# Altium PCB PCB_StyloDuino_2023-02-26.pcbdoc
Units mil, origin at the board's own origin, x right, y up, seen from the top; angles counter-clockwise.
Board outline 8220.46 x 5753.62 mil, 2 copper layers (Top Layer, Bottom Layer); 21 components, 48 nets, 93 pads, 0 vias.
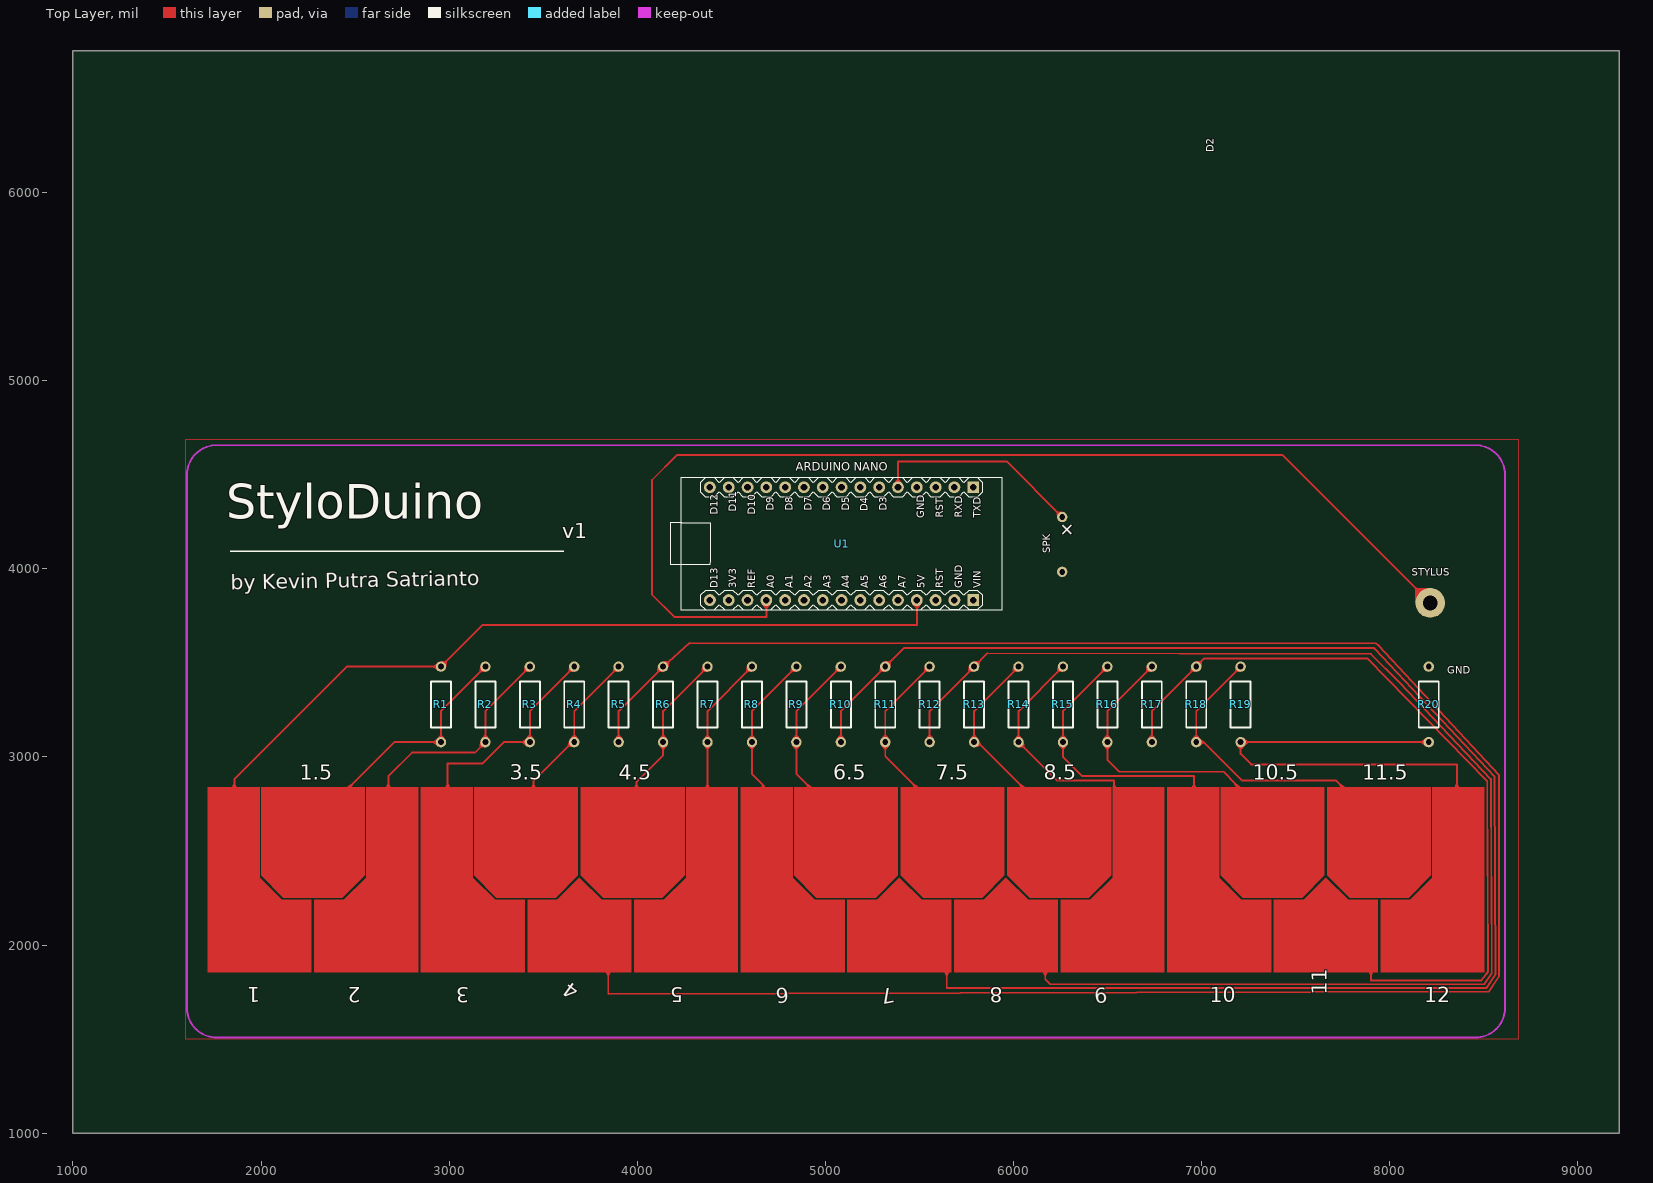
[diagram p0: Top Layer view]
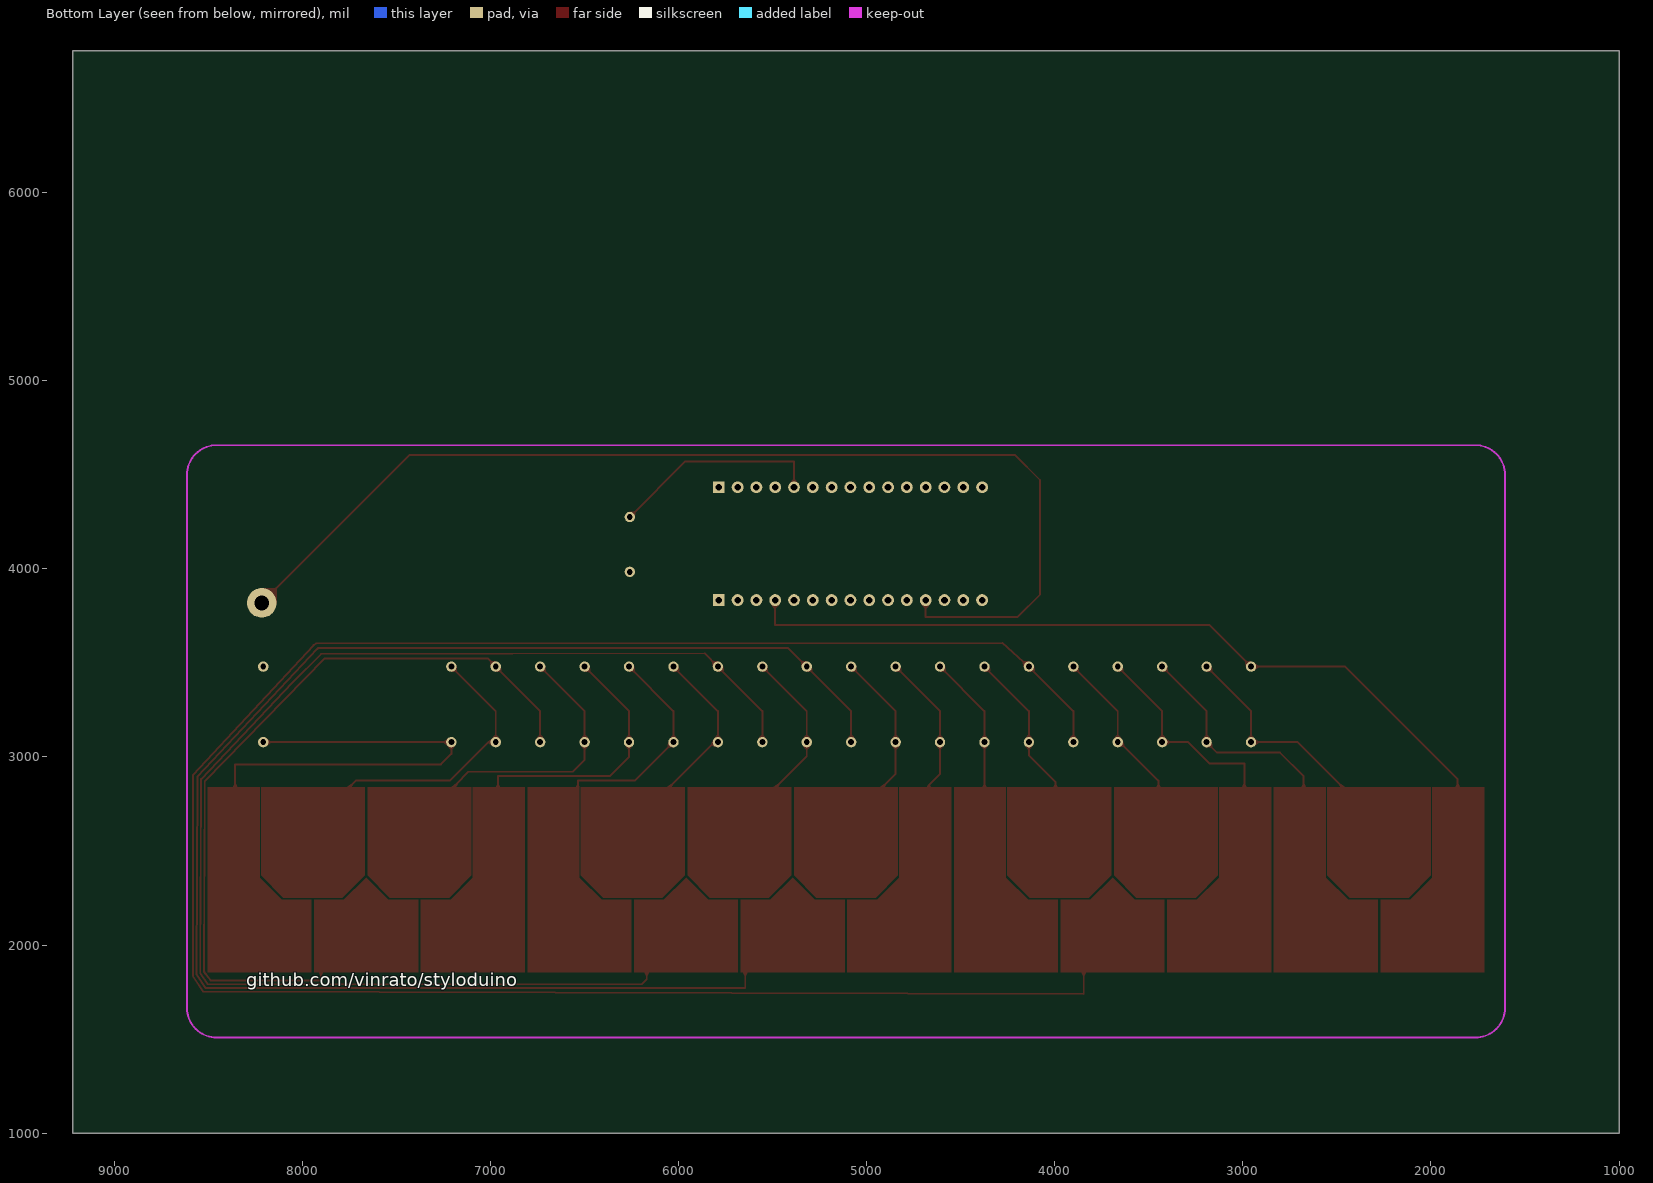
[diagram p1: Bottom Layer view, seen from below]

## Layer stack, top to bottom
Top Layer: signal copper (thickness not stored)
Dielectric: dielectric 12.6, FR-4, Dk 4.8
Bottom Layer: signal copper (thickness not stored)

## Board outline
9220.46,1000 1000,1000 1000,6753.62 9220.46,6753.62

## Components (designator, comment, footprint, x,y, rotation, side; value= is the part's Value field where it differs from the comment)
R1 "10k" RES-TH_BD2.7-L6.2-P10.20-D0.4 2956.69,3279.52 r90 top
R2 "10k" RES-TH_BD2.7-L6.2-P10.20-D0.4 3192.91,3279.52 r90 top
R3 "10k" RES-TH_BD2.7-L6.2-P10.20-D0.4 3429.13,3279.52 r90 top
R4 "10k" RES-TH_BD2.7-L6.2-P10.20-D0.4 3665.35,3279.52 r90 top
R5 "10k" RES-TH_BD2.7-L6.2-P10.20-D0.4 3901.57,3279.52 r90 top
R6 "10k" RES-TH_BD2.7-L6.2-P10.20-D0.4 4137.79,3279.52 r90 top
R7 "10k" RES-TH_BD2.7-L6.2-P10.20-D0.4 4374.01,3279.52 r90 top
R8 "10k" RES-TH_BD2.7-L6.2-P10.20-D0.4 4610.23,3279.52 r90 top
R9 "10k" RES-TH_BD2.7-L6.2-P10.20-D0.4 4846.45,3279.52 r90 top
R10 "10k" RES-TH_BD2.7-L6.2-P10.20-D0.4 5082.67,3279.52 r90 top
R11 "10k" RES-TH_BD2.7-L6.2-P10.20-D0.4 5318.89,3279.52 r90 top
R12 "10k" RES-TH_BD2.7-L6.2-P10.20-D0.4 5555.11,3279.52 r90 top
R13 "10k" RES-TH_BD2.7-L6.2-P10.20-D0.4 5791.33,3279.52 r90 top
R14 "10k" RES-TH_BD2.7-L6.2-P10.20-D0.4 6027.55,3279.52 r90 top
R15 "10k" RES-TH_BD2.7-L6.2-P10.20-D0.4 6263.77,3279.52 r90 top
R16 "10k" RES-TH_BD2.7-L6.2-P10.20-D0.4 6499.99,3279.52 r90 top
R17 "10k" RES-TH_BD2.7-L6.2-P10.20-D0.4 6736.21,3279.52 r90 top
R18 "10k" RES-TH_BD2.7-L6.2-P10.20-D0.4 6972.43,3279.52 r90 top
R19 "10k" RES-TH_BD2.7-L6.2-P10.20-D0.4 7208.65,3279.52 r90 top
R20 "10k" RES-TH_BD2.7-L6.2-P10.20-D0.4 8208.65,3279.52 r270 top
U1 "ARDUINO NANO" COMM-TH_ARDUINO_NANO 5086.61,4133.85 r0 top

## Footprints (in the part's own frame and the unit in brackets; to place one, negate y for a bottom-side part, rotate by r counter-clockwise, add the part's x,y. Pads: shape width x height; smd on the part's side, far side on the other; paste and mask are expansions set on the pad)
COMM-TH_ARDUINO_NANO [mm]
  rect 1.6x1.6 hole 0.9: 1(17.78,7.62) 30(17.78,-7.62)
  round 1.6 hole 0.9: 2(15.24,7.62) 3(12.7,7.62) 4(10.16,7.62) 5(7.621,7.62) 6(5.08,7.62) 7(2.541,7.62) 8(0,7.62) 9(-2.539,7.62) 10(-5.08,7.62) 11(-7.619,7.62) 12(-10.16,7.62) 13(-12.699,7.62) 14(-15.24,7.62) 15(-17.78,7.62) 16(-17.78,-7.62) 17(-15.241,-7.62) 18(-12.7,-7.62) 19(-10.161,-7.62) 20(-7.62,-7.62) 21(-5.081,-7.62) 22(-2.54,-7.62) 23(-0.001,-7.62) 24(2.54,-7.62) 25(5.079,-7.62) 26(7.62,-7.62) 27(10.159,-7.62) 28(12.7,-7.62) 29(15.24,-7.62)
  silkscreen extent -23.11,-8.97 21.67,8.97
RES-TH_BD2.7-L6.2-P10.20-D0.4 [mm]
  round 1.4 hole 0.8: 1(-5.1,0) 2(5.1,0)
  silkscreen extent -3.1,-1.35 3.1,1.35

## Free pads (board coordinates)
  round 0 smd: 2(1992.12,2500) 2(2559.05,2500) 2(3125.98,2500) 2(3692.91,2248.03) 2(4259.84,2500) 2(4826.77,2500) 2(5393.7,2248.03) 2(5960.62,2248.03) 2(6527.55,2500) 2(7094.48,2500) 2(7661.41,2248.03) 2(8228.33,2500) 3(2275.59,2645.67) 3(3409.45,2645.67) 3(3976.38,2645.67) 3(5110.23,2645.67) 3(5677.16,2645.67) 3(6244.09,2645.67) 3(7377.94,2645.67) 3(7944.87,2645.67)
  round 55.12 hole 31.5: 4(6259.83,4275.6) 5(6259.83,3984.26)
  round 157.48 hole 78.74: 6(8216.52,3818.91)

## Nets (pads, with @x,y where several pads share a name; then routed paths per layer and width w, separated by ;. In a path a pad name is that pad's centre, name@x,y a point inside that pad or via, vN(x,y) a via of type N, cw(c..) or ccw(c..) an arc to the next point about the centre after c; other vN are vias at no path point)
GND: pad.5 R20.1 U1.4 U1.29
KEY0: pad.2@1992.12,2500 R1.2 U1.27 | length 4792.2
  Top Layer w10: 1992.12,2248.01 1858.22,2381.91 1858.22,2881.91 2456.72,3480.31 R1.2 3177.17,3700.78 5488.18,3700.78 5488.18,3832.27 U1.27@5486.6,3833.85
KEY1: pad.3@2275.59,2645.67 R1.1 R2.2 | length 1359.9
  Top Layer w10: 2275.62,2645.71 2708.62,3078.71 R1.1 ; R1.1 2956.7,3244.1 R2.2
KEY2: pad.2@2559.05,2500 R2.1 R3.2 | length 1788.8
  Top Layer w10: 2559.03,2248.01 2677.12,2366.11 2677.12,2897.61 2803.12,3023.61 3137.82,3023.61 R2.1 ; R2.1 3192.91,3244.09 R3.2
KEY3: pad.2@3125.98,2500 R3.1 R4.2 | length 1755.7
  Top Layer w10: 3126.03,2248.01 2992.12,2381.91 2992.12,2964.61 3177.12,2964.61 3291.32,3078.71 R3.1 3429.12,3244.11 3489.43,3304.31 R4.2@3665.32,3480.31
KEY4: pad.3@3409.45,2645.67 R4.1 R5.2 | length 1045.4
  Top Layer w10: 3409.43,2645.71 3448.82,2685.01 3448.82,2874.01 3653.53,3078.71 R4.1@3665.32,3078.71 ; R4.1 3665.35,3244.09 R5.2
KEY5: pad.2@3692.91,2248.03 R5.1 R6.2 | length 11716.1
  Top Layer w10: 3692.93,2248.01 3846.43,2094.51 3846.43,1740.11 8527.52,1752.01 8582.62,1834.61 8582.62,2901.61 7940.93,3594.51 7929.12,3602.31 4279.52,3606.31 R6.2 3901.57,3244.09 R5.1
KEY6: pad.3@3976.38,2645.67 R6.1 R7.2 | length 999.4
  Top Layer w10: 3976.32,2645.71 3996.03,2665.31 3996.03,2866.11 4137.82,3007.91 R6.1 ; R6.1 4137.79,3244.09 R7.2
KEY7: pad.2@4259.84,2500 R7.1 R8.2 | length 1377.4
  Top Layer w10: 4259.82,2248.01 4374.02,2362.21 R7.1 ; R7.1 4374.01,3244.09 R8.2
KEY8: pad.2@4826.77,2500 R8.1 R9.2 | length 1419.8
  Top Layer w10: R8.1 4610.23,2909.41 4669.32,2850.41 4669.32,2405.51 4826.73,2248.01 ; R8.1 4610.23,3244.09 R9.2
KEY9: pad.3@5110.23,2645.67 R9.1 R10.2 | length 1041.7
  Top Layer w10: R9.1 4846.43,2909.41 5110.23,2645.71 ; R9.1 4846.45,3244.09 R10.2
KEY10: pad.2@5393.7,2248.03 R10.1 R11.2 | length 8664.5
  Top Layer w10: R10.1 5082.67,3244.09 R11.2 5417.32,3578.71 7917.32,3578.71 7921.23,3574.81 8559.02,2893.71 8563.02,1842.51 8515.73,1771.61 5645.62,1771.61 5645.62,1996.11 5393.73,2248.01
KEY11: pad.3@5677.16,2645.67 R11.1 R12.2 | length 1080.8
  Top Layer w10: R11.1 5318.93,3003.91 5677.12,2645.71 ; R11.1 5318.89,3244.09 R12.2
KEY12: pad.2@5960.62,2248.03 R12.1 R13.2 | length 7524.9
  Top Layer w10: R12.1 5555.11,3244.09 R13.2 ; R13.2 5862.23,3551.21 7901.52,3547.21 8051.12,3397.61 8055.12,3393.71 8539.33,2881.91 8543.33,1850.41 8503.92,1791.31 6196.82,1791.31 6169.32,1818.91 6169.32,2039.41 5960.62,2248.01
KEY13: pad.3@6244.09,2645.67 R13.1 R14.2 | length 1131.6
  Top Layer w10: R13.1 5811.02,3078.71 6244.12,2645.71 ; R13.1 5791.33,3244.09 R14.2
KEY14: pad.2@6527.55,2500 R14.1 R15.2 | length 1721.4
  Top Layer w10: R14.1@6027.52,3078.71 6232.23,2874.01 6535.43,2874.01 6535.43,2255.91 6527.52,2248.01 ; R14.1 6027.55,3244.09 R15.2
KEY15: pad.2@7094.48,2500 R15.1 R16.2 | length 2022.4
  Top Layer w10: R15.1 6263.77,3244.09 R16.2 ; R15.1 6263.82,3000.01 6366.12,2897.61 6960.62,2897.61 6960.62,2381.91 7094.43,2248.01
KEY16: pad.3@7377.94,2645.67 R16.1 R17.2 | length 1616.8
  Top Layer w10: R16.1 6500.02,2984.21 6563.02,2921.21 7118.12,2921.21 7129.93,2909.41 7377.93,2645.71 ; R16.1 6499.99,3244.09 R17.2
KEY17: pad.2@7661.41,2248.03 R17.1 R18.2 | length 4534
  Top Layer w10: R17.1 6736.21,3244.09 R18.2 ; R18.2 7015.73,3523.61 7881.93,3523.61 8519.62,2870.11 8523.62,1858.31 8488.23,1811.01 7901.52,1811.01 7901.52,2007.91 7661.43,2248.01
KEY18: pad.3@7944.87,2645.67 R18.1 R19.2 | length 1651.2
  Top Layer w10: R18.1 7011.82,3078.71 7216.52,2874.01 7716.52,2874.01 7944.82,2645.71 ; R18.1 6972.43,3244.09 R19.2
KEY19: pad.2@8228.33,2500 R19.1 R20.2 | length 3001.8
  Top Layer w10: R19.1 7208.62,3015.71 7263.73,2960.61 8358.23,2960.61 8358.23,2377.91 8228.33,2248.01 ; R19.1@7208.65,3078.73 R20.2
PEN: pad.6 U1.19 | length 5876.2
  Top Layer w10: U1.19 4686.6,3744.09 4196.85,3744.09 4078.74,3862.2 4078.74,4472.44 4212.59,4606.29 7429.12,4606.29 pad.6
SPK: pad.4 U1.5 | length 1132.5
  Top Layer w10: U1.5 5386.6,4570.86 5964.56,4570.86 pad.4
U1_1: U1.1
U1_2: U1.2
U1_3: U1.3
U1_6: U1.6
U1_7: U1.7
U1_8: U1.8
U1_9: U1.9
U1_10: U1.10
U1_11: U1.11
U1_12: U1.12
U1_13: U1.13
U1_14: U1.14
U1_15: U1.15
U1_16: U1.16
U1_17: U1.17
U1_18: U1.18
U1_20: U1.20
U1_21: U1.21
U1_22: U1.22
U1_23: U1.23
U1_24: U1.24
U1_25: U1.25
U1_26: U1.26
U1_28: U1.28
U1_30: U1.30

## Polygon pours and split planes (outlines as drawn)
GND on Top Layer (solid): 8685.02,4688.97 8685.02,1500 1598.42,1500 1598.42,4688.97 8685.02,4688.97

## Keep-outs
Keep-Out Layer:
  lines w10: 1606.3,1665.35 ccw(c1763.78,1665.35) 1763.78,1507.87 ; 1606.3,4499.99 cw(c1763.78,4499.99) 1763.78,4657.47 ; 8456.68,1507.87 ccw(c8456.68,1665.35) 8614.16,1665.35 ; 8456.68,4657.47 cw(c8456.68,4499.99) 8614.16,4499.99

## Other copper
Top Layer:
  region net KEY17: 7914.03,1854.33 7889.03,1854.33 7896.53,1839.33 7906.53,1839.33
  region net KEY15: 6948.13,2838.58 6973.13,2838.58 6965.63,2853.58 6955.63,2853.58
  region net KEY16: 7184.04,2838.58 7209.04,2838.58 7189.29,2853.58 7175.57,2853.58
  region net KEY19: 8370.72,2838.58 8345.72,2838.58 8353.22,2853.58 8363.22,2853.58
  region net KEY18: 7739.46,2838.58 7764.46,2838.58 7744.03,2853.58 7729.88,2853.58
  region net KEY14: 6547.93,2838.58 6527.55,2838.58 6530.43,2853.58 6540.43,2853.58
  region net KEY13: 6038.71,2838.58 6063.71,2838.58 6043.28,2853.58 6029.13,2853.58
  region net KEY11: 5471.75,2838.58 5496.75,2838.58 5476.32,2853.58 5462.18,2853.58
  region net KEY9: 4904.78,2838.58 4929.78,2838.58 4909.35,2853.58 4895.2,2853.58
  region net KEY12: 6181.82,1854.33 6156.82,1854.33 6164.32,1839.33 6174.32,1839.33
  region net KEY10: 5658.13,1854.33 5633.13,1854.33 5640.63,1839.33 5650.63,1839.33
  region net KEY8: 4656.82,2838.58 4681.82,2838.58 4674.32,2850.41 4664.32,2850.41
  region net KEY6: 3983.52,2838.58 4008.52,2838.58 4001.02,2853.58 3991.02,2853.58
  region net KEY7: 4386.53,2838.58 4361.53,2838.58 4369.03,2853.58 4379.03,2853.58
  region net KEY4: 3436.33,2838.58 3461.33,2838.58 3453.83,2853.58 3443.83,2853.58
  region net KEY3: 2979.63,2838.58 3004.63,2838.58 2997.13,2853.58 2987.13,2853.58
  region net KEY2: 2689.63,2838.58 2664.63,2838.58 2672.13,2853.58 2682.13,2853.58
  region net KEY0: 1845.72,2838.58 1870.72,2838.58 1863.22,2853.58 1853.22,2853.58
  region net KEY5: 3858.92,1854.33 3833.92,1854.33 3841.42,1839.33 3851.42,1839.33
  region net KEY1: 2456,2838.58 2481,2838.58 2490.57,2853.58 2476.42,2853.58
  region net PEN: 8221.45,3897.48 8137.94,3813.96 8137.18,3891.16 8144.25,3898.23
  region net SPK: 6232.33,4273.85 6261.56,4303.08 6236.84,4305.65 6229.77,4298.57
  region net KEY19: 8190.42,3058.06 8190.42,3099.4 8171.12,3083.73 8171.12,3073.73
  region net KEY0: 2954.97,3507.82 2984.2,3478.59 2986.76,3503.31 2979.69,3510.38
  region net KEY0: 2938.47,3459.64 2938.47,3500.98 2919.18,3485.31 2919.18,3475.31
  region net KEY1: 2938.48,3058.05 2938.46,3099.39 2919.17,3083.71 2919.18,3073.71
  region net KEY1: 2977.37,3096.96 2936.03,3096.96 2951.7,3116.25 2961.7,3116.25
  region net KEY18: 7181.15,3482.04 7210.38,3452.81 7185.66,3450.25 7178.59,3457.32
  region net KEY19: 7229.31,3060.48 7187.97,3060.52 7203.63,3041.21 7213.63,3041.21
  region net KEY19: 7226.88,3058.06 7226.88,3099.4 7246.17,3083.73 7246.17,3073.73
  region net KEY17: 6970.7,3507.82 6999.94,3478.59 7002.5,3503.31 6995.42,3510.38
  region net KEY17: 6944.93,3482.04 6974.16,3452.81 6949.43,3450.25 6942.36,3457.32
  region net KEY18: 6990.67,3099.39 6990.65,3058.05 7009.95,3073.71 7009.96,3083.71
  region net KEY18: 6993.1,3096.96 6951.76,3096.95 6967.43,3116.25 6977.43,3116.25
  region net KEY16: 6708.71,3482.04 6737.94,3452.81 6713.21,3450.25 6706.14,3457.32
  region net KEY17: 6756.88,3096.96 6715.54,3096.95 6731.21,3116.25 6741.21,3116.25
  region net KEY15: 6472.49,3482.04 6501.72,3452.81 6477,3450.25 6469.93,3457.32
  region net KEY16: 6520.68,3060.52 6479.34,3060.48 6495.03,3041.21 6505.03,3041.21
  region net KEY16: 6520.66,3096.96 6479.33,3096.95 6494.99,3116.25 6504.99,3116.25
  region net KEY14: 6236.27,3482.04 6265.5,3452.81 6240.78,3450.25 6233.71,3457.32
  region net KEY15: 6284.47,3060.53 6243.13,3060.47 6258.83,3041.2 6268.83,3041.22
  region net KEY15: 6284.44,3096.96 6243.1,3096.95 6258.77,3116.25 6268.77,3116.25
  region net KEY13: 6000.05,3482.04 6029.28,3452.81 6004.56,3450.25 5997.49,3457.32
  region net KEY14: 6025.8,3051.23 6055.06,3080.43 6057.6,3055.71 6050.52,3048.64
  region net KEY14: 6048.22,3096.96 6006.88,3096.95 6022.55,3116.25 6032.55,3116.25
  region net KEY12: 5789.6,3507.82 5818.84,3478.59 5821.4,3503.31 5814.32,3510.38
  region net KEY12: 5763.83,3482.04 5793.06,3452.81 5768.34,3450.25 5761.27,3457.32
  region net KEY13: 5816.24,3090.53 5799.93,3052.54 5823.69,3058.98 5827.94,3068.87
  region net KEY13: 5812,3096.96 5770.66,3096.95 5786.33,3116.25 5796.33,3116.25
  region net KEY11: 5527.61,3482.04 5556.84,3452.81 5532.12,3450.25 5525.05,3457.32
  region net KEY12: 5575.78,3096.96 5534.44,3096.95 5550.11,3116.25 5560.11,3116.25
  region net KEY10: 5317.18,3507.82 5346.4,3478.57 5348.97,3503.29 5341.91,3510.36
  region net KEY10: 5291.39,3482.04 5320.62,3452.81 5295.89,3450.25 5288.82,3457.32
  region net KEY11: 5339.58,3060.52 5298.24,3060.48 5313.92,3041.21 5323.92,3041.21
  region net KEY11: 5339.56,3096.96 5298.22,3096.95 5313.89,3116.25 5323.89,3116.25
  region net KEY9: 5055.17,3482.04 5084.4,3452.81 5059.67,3450.25 5052.6,3457.32
  region net KEY10: 5103.34,3096.96 5062,3096.95 5077.67,3116.25 5087.67,3116.25
  region net KEY8: 4818.95,3482.04 4848.18,3452.81 4823.46,3450.25 4816.39,3457.32
  region net KEY9: 4867.11,3060.48 4825.77,3060.52 4841.42,3041.21 4851.42,3041.2
  region net KEY9: 4867.12,3096.96 4825.79,3096.95 4841.45,3116.25 4851.45,3116.25
  region net KEY7: 4582.73,3482.04 4611.96,3452.81 4587.24,3450.25 4580.17,3457.32
  region net KEY8: 4630.9,3060.5 4589.56,3060.51 4605.23,3041.21 4615.23,3041.21
  region net KEY8: 4630.9,3096.96 4589.56,3096.95 4605.23,3116.25 4615.23,3116.25
  region net KEY6: 4346.51,3482.04 4375.74,3452.81 4351.02,3450.25 4343.95,3457.32
  region net KEY7: 4394.69,3060.51 4353.35,3060.5 4369.03,3041.21 4379.03,3041.21
  region net KEY7: 4394.68,3096.96 4353.34,3096.95 4369.01,3116.25 4379.01,3116.25
  region net KEY5: 4110.29,3482.04 4139.52,3452.81 4114.8,3450.25 4107.73,3457.32
  region net KEY5: 4165.15,3476.96 4137.7,3507.87 4162.53,3508.97 4169.17,3501.49
  region net KEY6: 4158.48,3060.52 4117.14,3060.48 4132.82,3041.21 4142.82,3041.21
  region net KEY6: 4158.46,3096.96 4117.12,3096.95 4132.79,3116.25 4142.79,3116.25
  region net KEY4: 3874.07,3482.04 3903.3,3452.81 3878.58,3450.25 3871.51,3457.32
  region net KEY5: 3922.24,3096.96 3880.9,3096.95 3896.57,3116.25 3906.57,3116.25
  region net KEY3: 3637.85,3482.04 3667.08,3452.81 3642.35,3450.25 3635.28,3457.32
  region net KEY4: 3660.91,3051.53 3638.92,3086.53 3630.85,3063.11 3636.31,3054.43
  region net KEY4: 3686.02,3096.96 3644.68,3096.95 3660.35,3116.25 3670.35,3116.25
  region net KEY2: 3401.63,3482.04 3430.86,3452.81 3406.13,3450.25 3399.06,3457.32
  region net KEY3: 3410.92,3058.05 3410.89,3099.39 3391.61,3083.71 3391.62,3073.71
  region net KEY3: 3449.8,3096.96 3408.46,3096.95 3424.13,3116.25 3434.13,3116.25
  region net KEY1: 3165.41,3482.04 3194.64,3452.81 3169.92,3450.25 3162.85,3457.32
  region net KEY2: 3165.41,3080.44 3194.66,3051.23 3169.94,3048.65 3162.86,3055.72
  region net KEY2: 3213.58,3096.96 3172.25,3096.95 3187.91,3116.25 3197.91,3116.25
  region net SPK: 5410.23,4454.68 5362.98,4454.68 5381.6,4476.73 5391.6,4476.73
  region net PEN: 4710.23,3813.02 4662.98,3813.02 4681.6,3790.97 4691.6,3790.97
  region net KEY0: 5463.76,3812.16 5510.98,3813.9 5493.18,3791.18 5483.18,3790.82
  region net KEY1: 2551.18,2370.08 2433.07,2251.97 2118.11,2251.97 2000,2370.08 2000,2838.58 2551.18,2838.58
  region net KEY5: 3417.32,1854.33 3417.32,2240.16 3574.8,2240.16 3692.91,2358.27 3811.02,2240.16 3968.5,2240.16 3968.5,1854.33
  region net KEY0: 1716.54,1854.33 1716.54,2838.58 1992.12,2838.58 1992.12,2358.27 2110.24,2240.16 2267.72,2240.16 2267.72,1854.33
  region net KEY2: 2834.64,1854.33 2834.64,2838.58 2559.05,2838.58 2559.05,2358.27 2440.94,2240.16 2283.46,2240.16 2283.46,1854.33
  region net KEY3: 2850.39,1854.33 2850.39,2838.58 3125.98,2838.58 3125.98,2358.27 3244.09,2240.16 3401.57,2240.16 3401.57,1854.33
  region net KEY4: 3685.03,2370.08 3566.93,2251.97 3251.97,2251.97 3133.86,2370.08 3133.86,2838.58 3685.03,2838.58
  region net KEY7: 4535.43,1854.33 4535.43,2838.58 4259.84,2838.58 4259.84,2358.27 4141.73,2240.16 3984.25,2240.16 3984.25,1854.33
  region net KEY6: 4251.96,2370.08 4133.85,2251.97 3818.89,2251.97 3700.78,2370.08 3700.78,2838.58 4251.96,2838.58
  region net KEY8: 4551.18,1854.33 4551.18,2838.58 4826.77,2838.58 4826.77,2358.27 4944.88,2240.16 5102.35,2240.16 5102.35,1854.33
  region net KEY10: 5118.1,1854.33 5118.1,2240.16 5275.59,2240.16 5393.7,2358.27 5511.81,2240.16 5669.28,2240.16 5669.28,1854.33
  region net KEY12: 5685.03,1854.33 5685.03,2240.16 5842.52,2240.16 5960.62,2358.27 6078.73,2240.16 6236.21,2240.16 6236.21,1854.33
  region net KEY9: 5385.82,2370.08 5267.71,2251.97 4952.75,2251.97 4834.64,2370.08 4834.64,2838.58 5385.82,2838.58
  region net KEY11: 5952.75,2370.08 5834.64,2251.97 5519.68,2251.97 5401.57,2370.08 5401.57,2838.58 5952.75,2838.58
  region net KEY13: 6519.68,2370.08 6401.56,2251.97 6086.6,2251.97 5968.49,2370.08 5968.49,2838.58 6519.68,2838.58
  region net KEY14: 6803.14,1854.33 6803.14,2838.58 6527.55,2838.58 6527.55,2358.27 6409.44,2240.16 6251.96,2240.16 6251.96,1854.33
  region net KEY18: 8220.46,2370.08 8102.35,2251.97 7787.39,2251.97 7669.28,2370.08 7669.28,2838.58 8220.46,2838.58
  region net KEY19: 8503.92,1854.33 8503.92,2838.58 8228.33,2838.58 8228.33,2358.27 8110.22,2240.16 7952.74,2240.16 7952.74,1854.33
  region net KEY16: 7653.53,2370.08 7535.42,2251.97 7220.46,2251.97 7102.35,2370.08 7102.35,2838.58 7653.53,2838.58
  region net KEY15: 6818.89,1854.33 6818.89,2838.58 7094.48,2838.58 7094.48,2358.27 7212.59,2240.16 7370.07,2240.16 7370.07,1854.33
  region net KEY17: 7385.81,1854.33 7385.81,2240.16 7543.3,2240.16 7661.41,2358.27 7779.52,2240.16 7936.99,2240.16 7936.99,1854.33

## Silkscreen, mask and mechanical layers (free items; w line width, h text height)
Top Overlay:
  rectangle: 1834.64,4088.58 3610.24,4098.42
  text "+" at 6294.54,4264.49 h80 r225
  text "StyloDuino" at 1814.96,4204.72 h314.96
  text "v1" at 3602.36,4161.41 h78.74
  text "SPK" at 6196.84,4082.67 h39.37 r90
  text "STYLUS" at 8118.1,3964.57 h39.37
  text "by Kevin Putra Satrianto" at 1839.27,3889.77 h78.74 r1
  text "GND" at 8307.08,3440.95 h39.37
  text "1.5" at 2204.72,2877.95 h78.74
  text "3.5" at 3322.84,2877.95 h78.74
  text "4.5" at 3901.57,2877.95 h78.74
  text "6.5" at 5043.31,2877.95 h78.74
  text "7.5" at 5586.6,2877.95 h78.74
  text "8.5" at 6161.4,2877.95 h78.74
  text "10.5" at 7271.65,2877.95 h78.74
  text "11.5" at 7854.31,2877.95 h78.74
  text "1" at 1996.07,1775.59 h78.74 r180
  text "2" at 2531.49,1775.59 h78.74 r180
  text "3" at 3106.3,1775.59 h78.74 r180
  text "5" at 4244.09,1775.59 h78.74 r180
  text "8" at 5944.88,1775.59 h78.74 r180
  text "6" at 4803.65,1775.44 h78.74 r185
  text "7" at 5358.62,1774.87 h78.74 r191
  text "9" at 6496.56,1775.44 h78.74 r185
  text "4" at 3696.37,1768.07 h78.74 r144
  text "11" at 7665.35,1736.22 h78.74 r90
  text "10" at 7043.3,1696.85 h78.74
  text "12" at 8185.02,1696.85 h78.74
Bottom Overlay:
  text "github.com/vinrato/styloduino" at 8299.19,1755.9 h118.11
Top Paste:
  drawing of 20 lines, arcs and shapes, not listed
Top Solder:
  drawing of 20 lines, arcs and shapes, not listed

## Text inside footprints (layer, text, board x,y; h text height)
U1: Top Overlay "D13" at 4427.86,3898.02 h39.37 r90; Top Overlay "3V3" at 4527.86,3898.02 h39.37 r90; Top Overlay "REF" at 4627.86,3898.02 h39.37 r90; Top Overlay "A0" at 4727.86,3898.02 h39.37 r90; Top Overlay "A1" at 4827.86,3898.02 h39.37 r90; Top Overlay "A2" at 4927.86,3898.02 h39.37 r90; Top Overlay "A3" at 5027.86,3898.02 h39.37 r90; Top Overlay "A4" at 5127.86,3898.02 h39.37 r90; Top Overlay "A5" at 5227.86,3898.02 h39.37 r90; Top Overlay "A6" at 5327.86,3898.02 h39.37 r90; Top Overlay "A7" at 5427.86,3898.02 h39.37 r90; Top Overlay "5V" at 5527.86,3898.02 h39.37 r90; Top Overlay "RST" at 5627.86,3898.02 h39.37 r90; Top Overlay "GND" at 5727.86,3898.02 h39.37 r90; Top Overlay "VIN" at 5827.86,3898.02 h39.37 r90; Top Overlay "D12" at 4427.08,4287.35 h39.37 r90; Top Overlay "D11" at 4527.08,4303.45 h39.37 r90; Top Overlay "D10" at 4627.08,4287.35 h39.37 r90; Top Overlay "D9" at 4727.08,4309.95 h39.37 r90; Top Overlay "D8" at 4827.08,4308.15 h39.37 r90; Top Overlay "D7" at 4927.08,4308.15 h39.37 r90; Top Overlay "D6" at 5027.08,4309.95 h39.37 r90; Top Overlay "D5" at 5127.08,4308.15 h39.37 r90; Top Overlay "D4" at 5227.08,4306.35 h39.37 r90; Top Overlay "D3" at 5327.08,4308.15 h39.37 r90; Top Overlay "D2" at 7064.88,6214.25 h39.37 r90; Top Overlay "GND" at 5527.08,4269.45 h39.37 r90; Top Overlay "RST" at 5627.08,4271.25 h39.37 r90; Top Overlay "RXD" at 5727.08,4271.25 h39.37 r90; Top Overlay "TXD" at 5827.08,4271.25 h39.37 r90